# Altium PCB projet_pcb_F103.PCBDOC
Units mil, origin at the board's own origin, x right, y up, seen from the top; angles counter-clockwise.
Board outline 3545 x 2760 mil, 2 copper layers (TopLayer, BottomLayer); 44 components, 48 nets, 165 pads, 0 vias.
Unrouted connection lines stored in the file: 99.
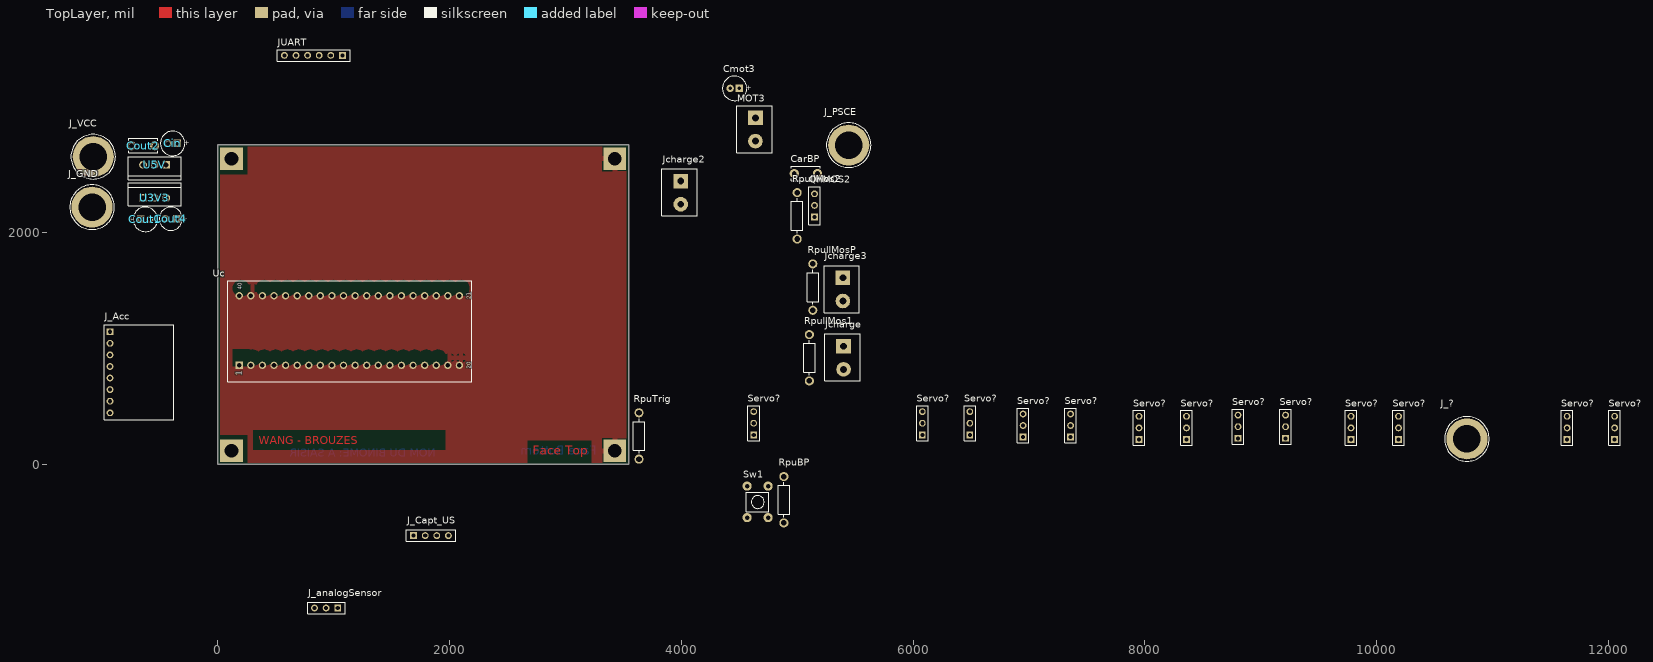
[diagram p0: TopLayer view]
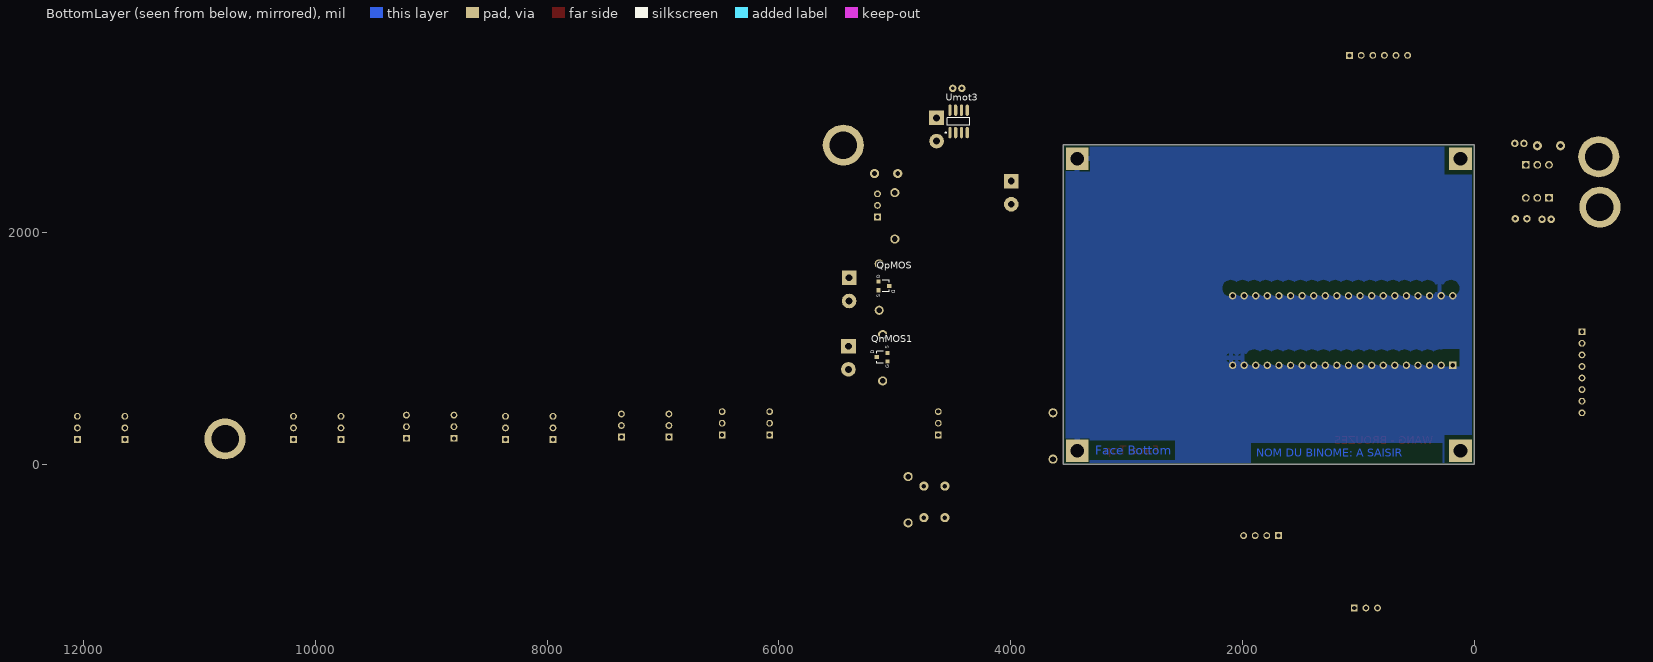
[diagram p1: BottomLayer view, seen from below]

## Layer stack, top to bottom
TopSolder: solder mask 0.4, Solder Resist, Dk 3.5
TopLayer: signal copper 1.4
Dielectric1: core 12.6, FR-4, Dk 4.8
BottomLayer: signal copper 1.4
BottomSolder: solder mask 0.4, Solder Resist, Dk 3.5

## Board outline
0,0 0,2760 3545,2760 3545,0

## Design rules (kind name [scope] priority, off if disabled: settings)
Clearance PowerPlaneClearance [InNamedPolygon('Bot-GND') Or  InNamedPolygon('Top-GND')] p1: gap=40 ignorepadtopadclearanceinfootprint=FALSE except(0: Arc-Hole Track-Hole SMDPad-Hole THPad-Hole Via-Hole Fill-Hole Poly-Hole Region-Hole Text-Hole)
Clearance [All] p2: gap=20 ignorepadtopadclearanceinfootprint=TRUE except(0: Arc-Hole Track-Hole SMDPad-Hole THPad-Hole Via-Hole Fill-Hole Poly-Hole Region-Hole Text-Hole)
FabricationTestPointUsage TestPointUsage [All] p1: valid=0 allowmultiple=FALSE
FabricationTestpoint Testpoint [All] p1: side=3 testpointundercomponent=TRUE minsize=40 maxsize=100 preferedsize=60 minholesize=20 maxholesize=40 preferedholesize=32 testpointgrid=1 allowsidetop=TRUE allowsidebottom=TRUE usegrid=TRUE gridtolerance=0.01
Height [All] p1: minheight=0 maxheight=2000 prefheight=500
HoleSize [All] p1: absolutevalues=TRUE maxlimit=300 minlimit=11.81 maxpercent=80.000 minpercent=20.000
PlaneClearance [All] p1: clearance=40
PlaneConnect [All] p1: planeconnectstyle=Relief reliefexpansion=19.68 reliefentries=4 reliefconductorwidth=40 reliefairgap=19.68
PolygonConnect [All] p1: connectstyle=Relief reliefconductorwidth=40 reliefentries=4 polygonreliefangle="90 Angle" airgapwidth=10
RoomDefinition projet_pcb_F103 [InComponentClass('projet_pcb_F103')] p1: confinementstyle=ConfineIn formatcopy=TRUE lockcomponents=FALSE outline 3575,-5 5410,-5 5410,595 3575,595
RoutingVias [All] p1: holewidth=23.62 width=60 viastyle="Through Hole" minholewidth=23.62 minwidth=60 maxholewidth=23.62 maxwidth=60
SilkToSolderMaskClearance SilkscreenOverComponentPads [IsPad] p1: minsilkscreentomaskgap=10 clearancetoexposedcopper=TRUE
SolderMaskExpansion [All] p1: expansion=2
Width [All] p1: maxlimit=1000 minlimit=20 preferedwidth=40
23 further rules are at their usual default settings.

## Classes and differential pairs
component class projet_pcb_F103: CarBP Cin Cmot3 Cout1 Cout2 Cout4 J_Acc J_analogSensor J_Capt_US J_GND J_PSCE J_VCC Jcharge Jcharge2 Jcharge3 JUART MOT3 QnMOS1 QnMOS2 QpMOS RpuBP RpullMos1 RpullMos2 RpullMosP RpuTrig Servo? Sw1 U3V3 U5V Uc Umot3

## Components (designator, comment, footprint, x,y, rotation, side; value= is the part's Value field where it differs from the comment)
CarBP "CONDENSATEUR_CER_RAD_5.08" CONDENSATEUR_CERAMIQUE_RADIAL_5.08 4975,2510 r0 top value=100nF
Cin "CONDENSATEUR_POL_ELECTROLY_RAD_2.0/5.08" CONDENSATEUR_POLARISE_ELECTROLYTIQUE_RADIAL_2.0/5.08 -390,2770 r180 top value=10µF/>25V
Cmot3 "10uF" CONDENSATEUR_POLARISE_ELECTROLYTIQUE_RADIAL_2.0/5.08 4460.63,3245 r180 top
Cout1 "CONDENSATEUR_POL_ELECTROLY_RAD_2.0/5.08" CONDENSATEUR_POLARISE_ELECTROLYTIQUE_RADIAL_2.0/5.08 -625,2115 r0 top value=1µF/>10V
Cout2 "CONDENSATEUR_CER_RAD_5.08" CONDENSATEUR_CERAMIQUE_RADIAL_5.08 -545,2750 r180 top value=100nF
Cout4 "CONDENSATEUR_POL_ELECTROLY_RAD_2.54/5.08" CONDENSATEUR_POLARISE_ELECTROLYTIQUE_RADIAL_2.54/5.08 -355,2120 r180 top value=4.7µF/63V
J_? "DOUILLE BANANE 4mm" DOUILLE_BANANE_4mm#1 10780,220 r0 top
J_Acc "BARRETTE_8 CONTACTS_1 RANGEE_FEMELLE_DROITE" BARRETTE_8_F_D -930,1145 r270 top
J_analogSensor "BARRETTE 3 CONTACTS 1 RANGEE FEMELLE DROITE" BARRETTE_3_F_D 1035,-1240 r180 top
J_Capt_US "BARRETTE_4 CONTACTS_1 RANGEE_FEMELLE_DROITE" BARRETTE_4_F_D 1690,-615 r0 top
J_GND "DOUILLE BANANE 4mm" DOUILLE_BANANE_4mm#2 -1085,2220 r0 top
J_PSCE "DOUILLE BANANE 4mm" DOUILLE_BANANE_4mm#2 5445,2755 r270 top
J_VCC "DOUILLE BANANE 4mm" DOUILLE_BANANE_4mm#2 -1075,2655 r0 top
Jcharge "BORNIER2 DROIT A VIS" BORNIER2_A_VIS 5400,1020 r270 top
Jcharge2 "BORNIER2 DROIT A VIS" BORNIER2_A_VIS 3995,2445 r270 top
Jcharge3 "BORNIER2 DROIT A VIS" BORNIER2_A_VIS 5395,1610 r270 top
JUART "BARRETTE_6 CONTACTS_1 RANGEE_FEMELLE_DROITE" BARRETTE_6_F_D 1075,3530 r180 top
MOT3 "BORNIER2 DROIT A VIS" BORNIER2_A_VIS 4640,2990 r270 top
QnMOS1 "TRANSISTOR_MOSFET-N_SOT23_GSD" TRANSISTOR_MOSFET-N_SOT23_GSD 5110,925 r90 bottom
QnMOS2 "TRANSISTOR_MOSFET-N_TO220_GDS" BARRETTE_3_F_D 5150,2135 r90 top
QpMOS "TRANSISTOR_MOSFET-P_SOT23_GSD" TRANSISTOR_MOSFET-P_SOT23_GSD 5095,1540 r270 bottom
RpuBP "RESISTANCE_AXIALE_1/4W" RESISTANCE_1/4W 4885,-105 r270 top value=10K
RpullMos1 "RESISTANCE_AXIALE_1/4W" RESISTANCE_1/4W 5105,1120 r270 top value=10K
RpullMos2 "RESISTANCE_AXIALE_1/4W" RESISTANCE_1/4W 5000,2345 r270 top value=10K
RpullMosP "RESISTANCE_AXIALE_1/4W" RESISTANCE_1/4W 5135,1730 r270 top value=10K
RpuTrig "10k" RESISTANCE_1/4W 3635,45 r90 top
Servo? "BARRETTE 3 CONTACTS 1 RANGEE MALE DROITE" BARRETTE_3_M_D 4625,255 r90 top
Servo? "BARRETTE 3 CONTACTS 1 RANGEE MALE DROITE" BARRETTE_3_M_D 6080,255 r90 top
Servo? "BARRETTE 3 CONTACTS 1 RANGEE MALE DROITE" BARRETTE_3_M_D 6490,255 r90 top
Servo? "BARRETTE 3 CONTACTS 1 RANGEE MALE DROITE" BARRETTE_3_M_D 7360,235 r90 top
Servo? "BARRETTE 3 CONTACTS 1 RANGEE MALE DROITE" BARRETTE_3_M_D 8360,215 r90 top
Servo? "BARRETTE 3 CONTACTS 1 RANGEE MALE DROITE" BARRETTE_3_M_D 6950,235 r90 top
Servo? "BARRETTE 3 CONTACTS 1 RANGEE MALE DROITE" BARRETTE_3_M_D 7950,215 r90 top
Servo? "BARRETTE 3 CONTACTS 1 RANGEE MALE DROITE" BARRETTE_3_M_D 8805,225 r90 top
Servo? "BARRETTE 3 CONTACTS 1 RANGEE MALE DROITE" BARRETTE_3_M_D 9215,225 r90 top
Servo? "BARRETTE 3 CONTACTS 1 RANGEE MALE DROITE" BARRETTE_3_M_D 10190,215 r90 top
Servo? "BARRETTE 3 CONTACTS 1 RANGEE MALE DROITE" BARRETTE_3_M_D 12055,215 r90 top
Servo? "BARRETTE 3 CONTACTS 1 RANGEE MALE DROITE" BARRETTE_3_M_D 9780,215 r90 top
Servo? "BARRETTE 3 CONTACTS 1 RANGEE MALE DROITE" BARRETTE_3_M_D 11645,215 r90 top
Sw1 "BOUTON_POUSSOIR_MINIATURE_TRAVERSANT" BOUTON_POUSSE_PLAT_6x6 4560,-475 r0 top
U3V3 "REGULATEUR_TO220_78XX" REGULATEUR_TO220_78XX -545,2300 r0 top
U5V "REGULATEUR_TO220_78XX" REGULATEUR_TO220_78XX -545,2585 r180 top
Uc "STM32F103C8T6/PCB_DIP40" STM32F103C8T6_DIP40 185,855 r90 top
Umot3 "BD6221F-E2" SOIC8_PAS=1.27_LARG=4_LONG=5 4450,2960 r90 bottom

## Footprints (in the part's own frame and the unit in brackets; to place one, negate y for a bottom-side part, rotate by r counter-clockwise, add the part's x,y. Pads: shape width x height; smd on the part's side, far side on the other; paste and mask are expansions set on the pad)
BARRETTE_3_F_D [mm] "BARRETTE 3 CONTACTS ; 1 RANGEE ; DROITE ; FEMELLE ; ESPACEMENT BROCHES = 2.54 mm"
  rect 1.5x1.5 hole 0.9: 1(0,0)
  round 1.5 hole 0.9: 2(2.54,0) 3(5.08,0)
  silkscreen extent -1.7,-1.27 6.61,1.27, body extent -1.56,-1.21 6.56,1.2, height 8.5
BARRETTE_3_M_D [mm] "BARRETTE 3 CONTACTS ; 1 RANGEE ; DROITE ; MALE ; ESPACEMENT BROCHES = 2.54 mm"
  rect 1.5x1.5 hole 0.9: 1(0,0)
  round 1.5 hole 0.9: 2(2.54,0) 3(5.08,0)
  silkscreen extent -1.27,-1.27 6.35,1.27, body extent -1.21,-1.42 6.41,1.5, height 8.61
BARRETTE_4_F_D [mm] "BARRETTE 4 CONTACTS ; 1 RANGEE ; DROITE ; FEMELLE ; ESPACEMENT BROCHES = 2.54 mm"
  rect 1.5x1.5 hole 0.9: 1(0,0)
  round 1.5 hole 0.9: 2(2.54,0) 3(5.08,0) 4(7.62,0)
  silkscreen extent -1.6,-1.27 9.2,1.27, body extent -1.53,-1.21 9.13,1.2, height 8.5
BARRETTE_6_F_D [mm] "BARRETTE 6 CONTACTS ; 1 RANGEE ; DROITE ; FEMELLE ; ESPACEMENT BROCHES = 2.54 mm"
  rect 1.5x1.5 hole 0.9: 1(0,0)
  round 1.5 hole 0.9: 2(2.54,0) 3(5.08,0) 4(7.62,0) 5(10.16,0) 6(12.7,0)
  silkscreen extent -1.7,-1.27 14.3,1.27, body extent -1.57,-1.2 14.17,1.21, height 8.5
BARRETTE_8_F_D [mm] "BARRETTE 8 CONTACTS ; 1 RANGEE ; DROITE ; FEMELLE ; ESPACEMENT BROCHES = 2.54 mm"
  rect 1.5x1.5 hole 0.9: 1(0,0)
  round 1.5 hole 0.9: 2(2.54,0) 3(5.08,0) 4(7.62,0) 5(10.16,0) 6(12.7,0) 7(15.24,0) 8(17.78,0)
  silkscreen extent -1.53,-1.27 19.3,13.97, body extent -1.53,-1.21 19.3,1.2, height 8.5
BORNIER2_A_VIS [mm] "BORNIER 2 PLOTS A VIS ; VERTICAL ; ESPACEMENT BROCHES = 5.08mm"
  rect 3.2x3.2 hole 1.5: 1(0,0)
  round 3.2 hole 1.5: 2(5.08,0)
  silkscreen extent -2.69,-4.15 7.62,3.63, body extent -2.5,-4 7.5,3.5, height 10
BOUTON_POUSSE_PLAT_6x6 [mil] "BOUTON POUSSOIR MINIATURE ON/OFF; BOUTON PLAT/LONG ; ESPACEMENT BROCHES = 7.62mm/5.08mm"
  round 79 hole 40: 1(7.87,15.75) 2(188.98,15.75) 3(188.98,287.4) 4(7.87,287.4)
  silkscreen extent 0,67 197,236, body extent -22,-1 222,310, height 276
CONDENSATEUR_CERAMIQUE_RADIAL_5.08 [mil] "CONDENSATEUR TRAVERSANT CERAMIQUE RADIAL ; DIMENSIONS : 3.17mm x 5.08mm"
  round 79 hole 40: 1(0,0) 2(200,0)
  silkscreen extent -25,-62 225,62, body extent -11,-43 209,42, height 148
CONDENSATEUR_POLARISE_ELECTROLYTIQUE_RADIAL_2.0/5.08 [mil] "CONDENSATEUR POLARISE ELECTROLYTIQUE RADIAL ; DIAMETRE : 5.08mm ; ESPACEMENT BROCHES : 2mm"
  rect 64x64 / inner round 64 / far side round 64 hole 32: 1(-39.37,0)
  round 64 hole 32: 2(39.37,0)
  silkscreen extent -106,-106 105,106, body extent -98,-98 98,98, height 433
CONDENSATEUR_POLARISE_ELECTROLYTIQUE_RADIAL_2.54/5.08 [mil] "CONDENSATEUR_POLARISE_ELECTROLYTIQUE_RADIAL ; DIAMETRE : 5.08mm ; ESPACEMENT BROCHES : 2.54mm"
  rect 64x64 / inner round 64 / far side round 64 hole 32: 1(0,0)
  round 64 hole 32: 2(100,0)
  silkscreen extent -50,-100 150,100, body extent -50,-101 149,98, height 446
DOUILLE_BANANE_4mm#1 [mm] "DOUILLE BANANE ; DIAMETRE PASSAGE CONTACT = 4 mm ; DIAMETRE PERCAGE = 6 mm"
  round 9 hole 6: 1(0,0)
  TopLayer pour cut-out: -5.55,2.35 -4.2,4.3 -2.3,5.6 0,6 2.3,5.6 4.2,4.3 5.55,2.35 6,0 5.55,-2.35 4.3,-4.25 2.35,-5.55 0,-6 -2.35,-5.55 -4.2,-4.3 -5.55,-2.35 -6,0
  BottomLayer pour cut-out: -5.55,2.35 -4.2,4.3 -2.3,5.6 0,6 2.3,5.6 4.2,4.3 5.55,2.35 6,0 5.55,-2.35 4.3,-4.25 2.35,-5.55 0,-6 -2.35,-5.55 -4.2,-4.3 -5.55,-2.35 -6,0
  silkscreen extent -4.89,-4.89 4.89,4.89, body extent -5.5,-5.6 5.63,5.53, height 4.79
DOUILLE_BANANE_4mm#2 [mm] "DOUILLE BANANE ; DIAMETRE PASSAGE CONTACT = 4 mm ; DIAMETRE PERCAGE = 6 mm"
  round 9 hole 6: 1(0,0)
  silkscreen extent -4.89,-4.89 4.89,4.89, body extent -5.5,-5.6 5.63,5.53, height 4.79
REGULATEUR_TO220_78XX [mm] "BOITIER TO220 ; DIMENSIONS : 11.2mm x 4.7mm ; ESPACEMENT BROCHES : 2.54 mm"
  rect 1.7x1.7 hole 1.1: 1(-2.54,0)
  round 1.7 hole 1.1: 2(0,0) 3(2.54,0)
  silkscreen extent -5.83,-1.77 5.8,3.29, body extent -5.61,-1.59 5.61,3.1, height 19.33
RESISTANCE_1/4W [mil] "RESISTANCE 0.25W; DIAMETRE : 2.54mm ; LONGUEUR : 6.35mm ; PAS : 10.16mm"
  round 79 hole 48: 1(0,0) 2(400,0)
  silkscreen extent 50,-50 350,50, body extent -15,-47 409,44, height 116
SOIC8_PAS=1.27_LARG=4_LONG=5 [mm] "Small Outline Integrated Circuit ; 8 Leads ; Body Width = 4 mm ; Pitch = 1.27 mm ; IPC Low Density"
  oval 2.5x0.7 smd: 1(-2.45,1.905) 2(-2.45,0.635) 3(-2.45,-0.635) 4(-2.45,-1.905) 5(2.45,-1.905) 6(2.45,-0.635) 7(2.45,0.635) 8(2.45,1.905)
  silkscreen extent -2.57,-2.5 0.8,2.93, body extent -3.01,-2.5 3,2.5, height 1.75
STM32F103C8T6_DIP40 [mm] "STM32F103 monté sur DIP40"
  rect 1.6x1.6 hole 1: 1(0,0)
  round 1.6 hole 1: 2(0,-2.54) 3(0,-5.08) 4(0,-7.62) 5(0,-10.16) 6(0,-12.7) 7(0,-15.24) 8(0,-17.78) 9(0,-20.32) 10(0,-22.86) 11(0,-25.4) 12(0,-27.94) 13(0,-30.48) 14(0,-33.02) 15(0,-35.56) 16(0,-38.1) 17(0,-40.64) 18(0,-43.18) 19(0,-45.72) 20(0,-48.26) 21(15.24,-48.26) 22(15.24,-45.72) 23(15.24,-43.18) 24(15.24,-40.64) 25(15.24,-38.1) 26(15.24,-35.56) 27(15.24,-33.02) 28(15.24,-30.48) 29(15.24,-27.94) 30(15.24,-25.4) 31(15.24,-22.86) 32(15.24,-20.32) 33(15.24,-17.78) 34(15.24,-15.24) 35(15.24,-12.7) 36(15.24,-10.16) 37(15.24,-7.62) 38(15.24,-5.08) 39(15.24,-2.54) 40(15.24,0)
  silkscreen extent -3.56,-50.92 18.54,2.54, body extent -3.63,-51.04 18.37,6.1, height 20.63
TRANSISTOR_MOSFET-N_SOT23_GSD [mm] "SOT23 ; DIMENSIONS : 3.0mm x 2.5 mm"
  rect 0.9x0.95 smd: 1(-0.95,-1.175) 2(0.95,-1.175) 3(0,1.175)
  silkscreen extent -1.3,-0.3 1.3,1.18, body extent -1.5,-1.57 1.5,1.57, height 1.1
TRANSISTOR_MOSFET-P_SOT23_GSD [mm] "SOT23 ; DIMENSIONS : 3.0mm x 2.5 mm"
  rect 0.9x0.95 smd: 1(-0.95,-1.175) 2(0.95,-1.175) 3(0,1.175)
  silkscreen extent -1.3,-0.3 1.3,1.18, body extent -1.5,-1.57 1.5,1.57, height 1.1

## Part data
CarBP Cout2: "CONDENSATEUR TRAVERSANT CERAMIQUE RADIAL 5.08mm", Type=RADIAL_5.08
Cin Cout1: "CONDENSATEUR POLARISE ELECTROLYTIQUE RADIAL 2.0/5.08", Type=POL_RAD_2.0/5.08
Cmot3: library part Condensateur, "Capacitor", LatestRevisionDate=17-Jul-2002, LatestRevisionNote="Re-released for DXP Platform.", PackageReference=RAD-0.3, Published=8-Jun-2000, Publisher="Altium Limited"
Cout4: "CONDENSATEUR POLARISE ELECTROLYTIQUE RADIAL 2.54/5.08", Type=POL_RAD_2.54/5.08
J_? J_GND J_PSCE J_VCC: library part DOUILLE_BANANE_4mm, "DOUILLE BANANE 4 mm", Type=BANANE_4mm
J_analogSensor: library part "BARRETTE_3 CONTACTS_1 RANGEE_FEMELLE_DROITE", Type=F_D_3
J_Capt_US: "BARRETTE 4 CONTACTS 1 RANGEE FEMELLE DROITE", Type=F_D_4
Jcharge Jcharge2 Jcharge3 MOT3: library part "BORNIER2_DROIT_A VIS", "BORNIER 2 PLOTS DROIT A VIS 5.08mm", Type=BORNIER2_D
JUART: "BARRETTE 6 CONTACTS 1 RANGEE FEMELLE DROITE", Type=F_D_6
QnMOS1: "TRANSISTOR MOSFET CANAL N BOITIER SOT23_GSD", Package=SOT23, Type=IRFML8244TRPBF
QnMOS2: "TRANSISTOR MOSFET CANAL N BOITIER TO220_GDS", Package=TO251-AA
QpMOS: "TRANSISTOR MOSFET CANAL P BOITIER SOT23_GSD", Package=SOT23, Type=IRLML5103
RpuBP RpullMos1 RpullMos2 RpullMosP: "RESISTANCE TRAVERSANTE AXIALE 1/4W", Type=1/4W
RpuTrig: library part Resistor, "Resistor", LatestRevisionDate=17-Jul-2002, LatestRevisionNote="Re-released for DXP Platform.", PackageReference=AXIAL-0.5, Published=8-Jun-2000, Publisher="Altium Limited"
Servo? Servo? Servo? Servo? Servo? Servo? Servo? Servo? Servo? Servo? Servo? Servo? Servo?: library part "BARRETTE_3 CONTACTS_1 RANGEE_MALE_DROITE", Type=M_D_3
Sw1: "BOUTON POUSSOIR MINIATURE TRAVERSANT ON/OFF", Type=B_POUSS_MINI_T
U3V3 U5V: "REGULATEUR DE TENSION POSITIVE 78XX BOITIER TO220", Package=(TO220)
  U3V3: Type=LF33CV
  U5V: Type=7805
Uc: "MICROCONTROLEUR 32 BITS - 72MHz - 34 I/O - 64 KO : FLASH - 20KO RAM - 10 CANAUX A/D 12 BITS - DIP40 - UART, SPI, I2C, USB, CAN", Package=DIP40, Type=STM32F103C8T6
Umot3: library part BD6220F, "H Bridge - 2A"
J_Acc: Type=F_D_8

## Free pads (board coordinates)
  rect 196.85x196.85 hole 118.11: 1(118.11,2637.8) 2(118.11,118.11) 3(3425.2,118.11) 4(3425.2,2637.8)

## Nets (pads, with @x,y where several pads share a name; then routed paths per layer and width w, separated by ;. In a path a pad name is that pad's centre, name@x,y a point inside that pad or via, vN(x,y) a via of type N, cw(c..) or ccw(c..) an arc to the next point about the centre after c; other vN are vias at no path point)
+3V3: Cout4.1 Jcharge.1 QpMOS.2 RpullMosP.2 U3V3.3
+3V3_BP: J_analogSensor.3 RpuBP.1 Uc.40
+5V: Cout1.1 Cout2.2 J_Capt_US.1 JUART.2 RpuTrig.2 U3V3.1 U5V.3 Uc.38
+5V_servos: J_?.1 Servo?.2
+12V: J_PSCE.1 Jcharge2.1
A7_SPI-MOSI: Servo?.3@10190,415 Uc.12
GND: CarBP.1 Cin.2 Cmot3.1 Cout1.2 Cout2.1 Cout4.2 J_Acc.2 J_analogSensor.1 J_Capt_US.4 J_GND.1 Jcharge3.2 JUART.3 pad.3 pad.4 QnMOS1.2 QnMOS2.3 RpullMos1.1 RpullMos2.1 Servo?.1 Sw1.1 U3V3.2 U5V.2 Uc.19 Uc.20 Uc.39 Umot3.8
MOT3_1: MOT3.2 Umot3.1
MOT3_2: MOT3.1 Umot3.7
NetJcharge2_2: Jcharge2.2 QnMOS2.2
NetJcharge3_1: Jcharge3.1 QpMOS.3
NetJcharge_2: Jcharge.2 QnMOS1.3
PA0_AN0: J_Acc.1 J_analogSensor.2 Uc.5
PA1_PWM2/2: Uc.6
PA2_PWM2/3: Servo?.3@9780,415 Uc.7
PA3_PWM2/4: Servo?.3@9215,425 Uc.8
PA4_KEYBI0: Uc.9
PA5_KEYBI1: Uc.10
PA6_KEYBI2: Uc.11
PA8_KEYBO0: Uc.25
PA8_PWM1/1: Servo?.3@8805,425
PA9_KEYBO1: Uc.26
PA9_PW1/2: Servo?.3@7950,415
PA10_KEYBO2: Servo?.3@8360,415 Uc.27
PA10_PWM3: Umot3.4
PA11_KEYBO3: Servo?.3@6950,435 Uc.28
PA12_OUT: Uc.29
PA15_PWM2/1: Servo?.3@7360,435 Uc.30
PB0_PWM3/3: Servo?.3@6490,455 Uc.13
PB1_PWM3/2: Servo?.3@6080,455 Uc.14
PB3_PWM2/2: Uc.31
PB4_LCD_RW: J_Capt_US.3 Servo?.3@4625,455 Uc.32
PB5_LCD_E: J_Capt_US.2 RpuTrig.1 Uc.33
PB6_TIM4_CH1_servo: JUART.5 Uc.34
PB7_U1RX: JUART.4 Uc.35
PB8_I2C_SCL: J_Acc.3 Uc.36
PB9_I2C_SDA: J_Acc.4 Uc.37
"PB10 PWM2/3": Servo?.3@11645,415
PB10_PWM2/3: Uc.15
"PB11 PWM2/4": Servo?.3@12055,415
PB11_LCD_D6: Uc.16
PB12_BUTTON: CarBP.2 RpuBP.2 Sw1.2 Uc.21
PB13_LEDS_WS2812: QpMOS.1 RpullMosP.1 Uc.22
PB14_NMOS1: QnMOS1.1 RpullMos1.2 Uc.23
PB15_NMOS2: QnMOS2.1 RpullMos2.2 Uc.24 Umot3.5
PC14_OSC32: Uc.3
PC15_OSC32: Uc.4
VCC: Cin.1 Cmot3.2 J_VCC.1 U5V.1 Umot3.2 Umot3.3 Umot3.6
pads on no net: J_Acc.5 J_Acc.6 J_Acc.7 J_Acc.8 JUART.1 JUART.6 Sw1.3 Sw1.4 Uc.1 Uc.2 Uc.17 Uc.18

## Polygon pours and split planes (outlines as drawn)
GND on BottomLayer "Bot-GND" (solid, pour order 5): 20,2740 3525,2740 3525,15 20,15
GND on TopLayer "Top-GND" (solid, pour order 4): 20,2740 3525,2740 3525,15 20,15

## Other copper
TopLayer:
  text "WANG - BROUZES" at 355,175 h70.87
  text "Face Top" at 2720,85 h75
BottomLayer:
  text "Face Bottom" at 3270,85 h75
  text "NOM DU BINOME: A SAISIR" at 1880,65 h70.87

## Silkscreen, mask and mechanical layers (free items; w line width, h text height)
Mechanical1:
  the board outline again, w20

## Text inside footprints (layer, text, board x,y; h text height)
Cin: TopOverlay "+" at -241.18,2791.65 h45 r180
Cmot3: TopOverlay "+" at 4609.45,3266.65 h45 r180
Cout1: TopOverlay "+" at -773.82,2093.35 h45
Cout4: TopOverlay "+" at -258.15,2141.65 h45 r180
QnMOS1: BottomOverlay "D" at 5176.93,956.5 h31.5 r270; BottomOverlay "S" at 5050.94,995.87 h31.5 r270; BottomOverlay "G" at 5047.01,830.51 h31.5 r270
QpMOS: BottomOverlay "G" at 5157.99,1634.49 h31.5 r90; BottomOverlay "S" at 5154.06,1469.13 h31.5 r90; BottomOverlay "D" at 5028.07,1508.5 h31.5 r90
Uc: TopOverlay "1" at 208.62,764.45 h50 r90; TopOverlay "20" at 2185,825 h35.43 r90; TopOverlay "40" at 205,1505 h35.43 r90; TopOverlay "21" at 2185,1425 h35.43 r90